# Altium PCB Arduino_DUE_V02b.PcbDoc (part 2 of 3)
Units mm, origin at the board's own origin, x right, y up, seen from the top; angles counter-clockwise.
Board outline 112.18 x 53.64 mm, 4 copper layers (Top Layer, Mid-Layer 1, Mid-Layer 2, Bottom Layer); 129 components, 175 nets, 644 pads, 366 vias.
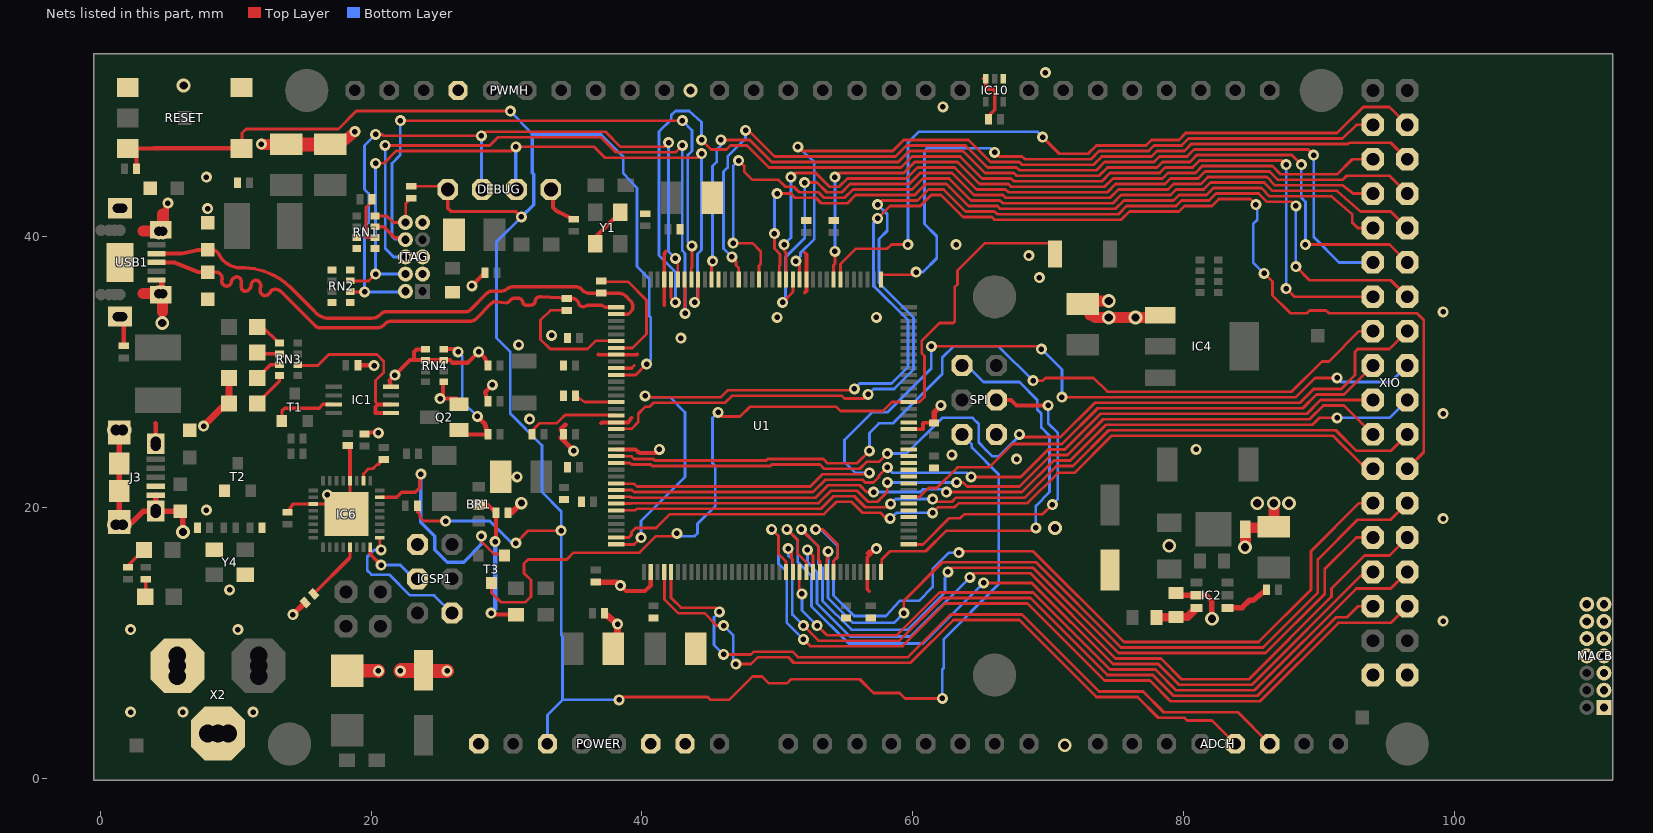
[diagram p4: the nets of this part, all layers, seen from the top]

## Via types
v1: diameter 0.813, hole 0.406, Top Layer to Bottom Layer, 313 vias
v2: diameter 1.016, hole 0.61, Top Layer to Bottom Layer, 52 vias
v3: diameter 0.914, hole 0.508, Top Layer to Bottom Layer, 1 vias

## Nets (pads, with @x,y where several pads share a name; then routed paths per layer and width w, separated by ;. In a path a pad name is that pad's centre, name@x,y a point inside that pad or via, vN(x,y) a via of type N, cw(c..) or ccw(c..) an arc to the next point about the centre after c; other vN are vias at no path point) (continued)
D+: R6.1 U1.37 USB1.3 Z1.1 | length 40.9
  Top Layer w0.254: Z1.1@7.925,37.389 8.525,37.389 cw(c8.5,36.897) 8.991,36.872 ccw(c9.338,36.719) 9.186,36.373 9.195,36.373 ccw(c9.322,36.703) 9.652,36.576 cw(c10.109,36.576) 10.109,37.033 cw(c10.033,36.652) 10.414,36.576 10.414,36.322 ccw(c10.719,36.271) 10.668,35.966 ccw(c10.668,36.424) 11.125,36.424 cw(c11.506,36.398) 11.532,36.779 cw(c11.43,36.373) 11.836,36.271 ccw(c12.243,36.068) 12.04,35.662 ccw(c12.141,36.119) 12.598,36.017 cw(c12.922,35.506) 13.27,36.001 15.816,33.463 ccw(c16.242,33.848) 16.217,33.274 20.463,33.274 ccw(c20.463,33.909) 20.912,33.46 21.023,33.571 cw(c21.472,33.122) 21.472,33.757 27.296,33.757 ccw(c27.296,34.392) 27.745,33.943 28.872,35.069 cw(c29.183,34.779) 29.168,35.204 29.948,35.103 ccw(c29.897,35.53) 30.235,35.264 cw(c30.633,34.967) 30.561,35.458 30.785,35.458 cw(c30.836,35.103) 31.191,35.154 ccw(c31.445,35.204) 31.496,34.95 31.801,34.95 ccw(c31.801,35.255) 32.106,35.255 cw(c32.461,35.204) 32.512,35.56 R6.1@34.635,35.458 ; R6.1@34.392,35.458 34.43,35.458 R6.1@34.442,35.446 R6.1@34.635,35.458 ; 37.287,34.798 37.279,34.807 ; U1.37@38.095,34.785 37.948,34.798 37.299,34.798 ; R6.1@34.635,35.458 34.789,35.458 cw(c34.776,34.854) 35.212,35.272 35.298,35.136 ccw(c35.742,35.228) 35.493,34.849 35.639,34.823 ccw(c35.651,35.218) 35.71,34.828 35.909,34.907 cw(c36.003,34.671) 36.003,34.925 37.033,34.925 37.279,34.807 ; 37.279,34.807 ccw(c37.299,34.827) 37.299,34.798 ; 37.279,34.807 ccw(c37.299,34.827) 37.299,34.798
  Top Layer w0.305: USB1.3@4.369,38.1 USB1.3@4.148,38.1 5.486,38.1 7.214,37.389 7.925,37.389 Z1.1@7.925,37.373
D-: R5.1 U1.38 USB1.2 Z2.1 | length 40.6
  Top Layer w0.254: USB1.2@4.148,38.75 4.445,38.75 ccw(c4.445,38.786) USB1.2@4.47,38.76 ; Z2.1@7.722,39.014 Z2.1@7.925,39.03 ; Z2.1@7.925,39.014 8.395,39.014 cw(c8.127,38.338) 8.797,38.621 8.975,38.333 ccw(c10.4,39.593) 10.302,37.694 cw(c10.484,32.589) 13.965,36.327 ; 13.965,36.327 15.783,34.509 ccw(c16.89,35.393) 16.731,33.985 20.053,33.985 ccw(c20.063,34.85) 20.667,34.231 cw(c21.178,33.807) 21.116,34.468 26.982,34.468 ccw(c27.009,34.936) 27.321,34.586 28.546,35.81 cw(c28.97,35.363) 28.987,35.979 29.603,35.979 ccw(c29.603,36.614) 29.991,36.111 30.093,36.19 cw(c30.443,35.674) 30.481,36.297 35.107,36.297 cw(c35.119,35.699) 35.598,36.057 ccw(c36.098,36.479) 36.149,35.827 R5.1@36.944,35.827 ; U1.38@38.095,34.285 38.883,34.285 ccw(c38.919,34.516) 39.057,34.327 39.277,34.598 ccw(c39.088,34.736) 39.319,34.772 39.319,34.87 ccw(c38.619,34.813) 39.074,35.348 38.835,35.587 ; 38.835,35.587 ccw(c38.268,34.993) 38.249,35.814 36.982,35.814 R5.1@36.982,35.827 ; R5.1@36.944,35.827 36.982,35.763 R5.1@36.982,35.827 ; R5.1@36.944,35.827 R5.1@36.982,35.827
  Top Layer w0.305: USB1.2@4.216,38.76 4.47,38.76 6.045,38.76 7.214,39.014 7.925,39.014 Z2.1@7.925,39.03 Z2.1@7.909,39.014
DAC0(CANRX1): ADCH.5 U1.76 | length 52.9
  Top Layer w0.203: U1.76@41.645,15.235 41.656,15.037 41.656,13.208 42.672,12.192 44.602,12.192 45.517,11.278 v1(46.025,11.278) ; v1(46.939,8.433) 48.057,8.433 48.565,8.941 50.8,8.941 51.206,8.534 59.842,8.534 62.992,11.684 67.869,11.684 73.558,5.994 76.606,5.994 78.13,4.47 80.061,4.47 80.264,4.267 82.093,4.267 ADCH.5@83.82,2.54 ADCH.5@83.718,2.642
  Bottom Layer w0.203: v1(46.025,11.278) 46.736,10.566 46.736,8.636 v1(46.939,8.433)
DAC1: ADCH.6 U1.77 | length 55.4
  Top Layer w0.203: U1.77@42.145,15.235 42.145,13.329 42.875,12.598 45.415,12.598 v1(45.72,12.294) ; v1(46.025,9.144) 48.057,9.144 48.26,9.347 51.105,9.347 51.511,8.941 59.639,8.941 62.789,12.09 68.072,12.09 73.762,6.401 77.013,6.401 78.537,4.877 84.023,4.877 ADCH.6@86.36,2.54
  Bottom Layer w0.203: v1(45.72,12.294) 45.314,11.887 45.314,9.855 v1(46.025,9.144)
EEXTINT: U1.25
EEXTINTA: MACB.8
EMDC: U1.123
EMDCA: MACB.14
EMDIO: U1.127
EMDIOA: MACB.12
EN: IC2.4 R10.2 | length 3.4
  Top Layer w0.406: IC2.4@83.243,12.563 83.278,12.598 84.328,12.598 84.876,13.147 85.141,13.147 R10.2@86.119,13.919
ERASE_CMD: IC6.23 T3.3 | length 17.8
  Top Layer w0.203: v1(28.143,17.882) 28.143,17.475 29.058,16.561 29.743,16.561 T3.3@29.845,16.459
  Top Layer w0.254: IC6.23@20.636,20.757 21.875,20.757 22.25,21.133 23.266,21.133 23.571,21.438 23.571,22.352 v1(23.673,22.454)
  Bottom Layer w0.254: v1(23.673,22.454) 23.673,18.898 24.689,17.882 24.689,16.866 25.603,15.951 26.822,15.951 28.143,17.272 v1(28.143,17.882)
ERASE_S: ERASE.2 T3.1 U1.130 | length 66.3
  Top Layer w0.203: T3.1@28.88,14.427 28.88,13.691 29.566,13.005 31.394,13.005 31.801,13.411 31.801,14.63 31.293,15.138 31.293,15.85 31.598,16.154 34.442,16.154 34.95,16.662 39.827,16.662 41.046,17.882 42.367,17.882 v1(42.57,18.085) ; v1(45.618,27.026) 45.923,26.721 47.244,26.721 47.955,27.432 54.356,27.432 54.661,27.127 57.81,27.127 58.468,27.785 U1.130@59.695,27.785 60.5,27.785 60.858,28.143 60.858,31.191 60.655,31.394 60.655,32.309 61.976,33.63 62.992,33.63 63.094,33.731 63.094,36.271 63.297,36.474 63.297,37.49 65.329,39.522 70.002,39.522 70.51,39.014 ERASE.2@70.51,38.71
  Bottom Layer w0.203: v1(42.57,18.085) 42.672,18.085 42.875,17.882 43.891,17.882 44.094,18.085 44.094,18.796 45.415,20.117 45.415,23.063 45.212,23.266 45.212,26.619 v1(45.618,27.026)
ERX_DV: U1.119
ERX_DVA: MACB.10
ERX_ER: U1.122
ERX_ERA: MACB.13
ERXD0: U1.120
ERXD0A: MACB.9
ERXD1: U1.121
ERXD1A: MACB.11
ETX_CLK: U1.113
ETX_CLKA: MACB.1
ETX_EN: U1.114
ETX_ENA: MACB.3
ETXD0: U1.115
ETXD0A: MACB.5
ETXD1: U1.118
ETXD1A: MACB.7
FB: IC2.3 R11.1 R12.2 | length 3.2
  Top Layer w0.61: R12.2@78.003,11.887 79.426,11.887 R11.1@79.451,11.913 80.293,11.913 IC2.3@80.943,12.563
GATE_CMD: IC1.7 T1.3 | length 4.8
  Top Layer w0.203: IC1.7@17.069,27.61 IC1.7@17.243,27.614
  Top Layer w0.254: T1.3@13.386,26.391 13.411,26.416 13.411,27.127 13.614,27.33 16.154,27.33 16.434,27.61 IC1.7@17.069,27.61
GND: C1.- C2.- C3.- C4.1 C5.1 C6.1 C7.1 C8.1 C9.1 C10.1 C11.- C12.1 C13.1 C14.1 C15.1 C16.1 C17.1 C18.1 C19.1 C21.2 C22.2 C23.2 C24.2 C25.2 C26.2 C27.- C28.2 C29.- C30.1 C31.1 C32.1 C33.- C34.1 C35.- C36.2 C37.2 C38.2 C39.2 C40.2 C41.- D1.A D4.P$2 DEBUG.1 IC1.4 IC2.2 IC4.1 IC6.3 IC6.28 IC6.33 IC10.1 IC10.3 ICSP1.6 J3.P5 J3.P$1 J3.P$2 J3.P$3 J3.P$4 J3.P$5 J3.P$6 J3.P$7 J3.P$8 J3.S1 J3.S2 J3.S3 J3.S4 J3.S5 J3.S6 JTAG.3 JTAG.5 JTAG.9 L.C ON.C PC1.- PC2.- POWER.6 POWER.7 PWMH.7 Q2.2 R2.1 R7.1 R8.1 R11.2 R18.2 RESET.1 RESET.2 RN1.1 RN1.2 RN1.7 RN1.8 RN2.1 RN2.4 RN2.5 RN2.8 RN4.1 RN4.2 RN4.5 RN4.7 SPI.6 T2.3 U1.12 U1.33 U1.44 U1.46 U1.54 U1.58 U1.74 U1.106 U1.126 USB1.5 USB1.P$1 USB1.P$2 USB1.P$3 USB1.P$4 USB1.P$5 USB1.P$6 USB1.P$7 USB1.P$8 USB1.P$9 USB1.P$10 USB1.P$11 USB1.S1 USB1.S2 USB1.S3 USB1.S4 X2.1 X2.3 XIO.35 XIO.36 Y1.2 Y1.4 Y4.2 Y4.4 Z1.2 Z2.2 Z3.1 Z4.1 Z5.1 | length 159
  Top Layer w0.203: RESET.2@10.363,51.613 RESET.2@10.423,51.018 ; R2.1@20.053,42.774 20.053,42.609 19.609,42.164 19.609,39.929 19.615,39.935 RN1.2@20.284,39.935 ; 39.226,30.285 39.421,30.48 ; U1.33@41.645,36.835 U1.33@41.656,36.982 ; 56.896,16.764 57.099,16.967 v1(57.302,16.967) ; U1.126@59.695,25.785 59.737,25.785 U1.126@59.741,25.781
  Top Layer w0.254: USB1.S2@4.448,35.7 4.572,35.776 USB1.P$11@4.572,35.763 ; C36.2@13.818,19.647 14.222,20.257 IC6.3@15.736,20.257 17.538,20.257 17.678,20.117 17.678,20.015 IC6.33@18.186,19.507 ; IC6.33@18.436,19.507 IC6.28@18.436,21.957 ; U1.106@56.645,15.186 56.645,14.583 ; 56.794,13.818 56.645,13.967 56.645,14.583 ; v1(57.302,16.967) 56.642,16.307 56.642,14.58 56.645,14.583 ; IC10.3@65.19,51.65 IC10.3@65.39,51.65 65.39,51.044 65.532,50.902 65.938,50.902 66.04,50.8 66.04,49.378 65.596,48.933 C37.2@65.596,48.666
  Top Layer w0.279: 36.779,31.293 36.787,31.285 U1.44@38.095,31.285 39.616,31.285 39.624,31.293 ; 36.982,26.213 37.055,26.285 U1.54@38.095,26.285 38.985,26.285 39.218,26.619 ; U1.58@38.095,24.285 39.52,24.285 39.726,24.079 ; U1.46@38.095,30.285 39.226,30.285 ; 39.776,24.079 39.827,24.028 v1@41.25,24.028 ; U1.74@40.645,15.133 U1.74@40.645,15.235 ; 41.643,34.95 41.643,38.71 ; U1.33@41.645,36.835 41.645,38.203 41.643,38.71 ; 41.758,38.913 41.643,38.71 ; 52.019,35.865 52.145,35.991 U1.12@52.145,36.835 52.145,38.685 52.019,38.811 ; 56.642,16.612 56.794,16.764 56.896,16.764 ; U1.106@56.645,15.186 U1.106@56.645,15.235 ; U1.126@59.538,25.781 59.741,25.781 60.757,25.781 60.757,26.213 60.795,26.251 C8.1@61.57,26.251
  Top Layer w0.305: C28.2@1.727,31.941 USB1.P$7@1.727,33.771 ; C30.1@18.263,24.575 18.436,24.195 IC6.28@18.436,21.957 ; C31.1@19.012,30.505 20.091,30.505 v1(20.218,30.48) ; C38.2@19.507,25.438 20.462,25.644 v1(20.523,25.502) ; IC1.4@21.468,28.914 21.366,29.393 v1(21.742,29.769) 22.854,30.88 RN4.2@24.014,30.88 ; RN4.1@24.014,31.68 23.349,31.68 23.165,31.496 23.165,30.988 23.266,30.886 24.007,30.886 RN4.2@24.014,30.88 ; RN4.5@25.364,29.28 25.318,29.28 25.298,29.261 25.298,28.245 v1(25.095,28.042) 26.282,28.042 Q2.2@26.5,27.62 ; v1(27.432,36.373) 28.194,37.135 C25.2@28.41,37.338 ; C23.2@28.613,27.838 28.408,28.509 v1(28.956,29.058) ; C24.2@28.613,30.48 28.408,31.028 v1(27.94,31.496) 27.127,30.683 26.01,30.683 25.813,30.88 RN4.7@25.364,30.88 RN4.2@24.014,30.88 ; DEBUG.1@33.274,43.485 33.426,43.637 33.426,42.164 33.691,41.9 C22.2@34.95,41.288 ; Y1.2@36.54,39.49 36.54,39.94 Y1.4@38.39,41.79 ; v1(38.405,14.224) 38.811,13.818 40.234,13.818 40.645,14.229 U1.74@40.645,15.133 ; 39.726,24.079 39.776,24.079
  Top Layer w0.356: 4.064,26.213 4.089,26.187 J3.S3@4.089,24.714 ; 34.341,26.111 33.996,25.766 C15.1@34.201,25.4 33.996,25.136 v1(34.95,24.181)
  Top Layer w0.406: J3.S1@1.397,25.527 J3.S5@1.397,23.241 J3.S6@1.397,21.209 J3.S2@1.397,18.923 2.362,18.923 3.15,19.71 4.064,19.71 J3.S4@4.089,19.736 ; J3.P5@4.089,20.904 J3.S4@4.089,19.736 ; USB1.P$11@4.369,35.865 ccw(c4.356,36.055) 4.547,36.068 USB1.5@4.547,36.779 ; USB1.P$9@4.47,40.945 4.877,40.945 v1@4.877,42.469 ; v2(6.096,18.186) 6.096,19.406 Z4.1@5.893,19.726 5.883,19.736 J3.S4@4.089,19.736 ; v1(14.224,12.09) R18.2@15.129,12.995 ; RN2.5@18.455,35.148 18.491,35.148 RN2.5@18.491,35.154 ; C34.1@30.112,19.609 30.378,19.609 v3(31.09,20.32) ; C10.1@36.576,14.491 38.138,14.491 v1(38.405,14.224) ; C8.1@61.57,26.251 61.57,27.026 v1(62.078,27.534) ; R11.2@79.451,13.691 79.629,13.513 IC2.2@80.943,13.513 81.686,13.513 82.093,13.106 v2(82.093,11.786)
  Top Layer w0.508: v1(7.62,26.01) 8.983,27.373 ON.C@9.491,27.686 L.C@9.491,29.566 ; C18.1@37.224,12.192 v1(38.202,11.379) 38.202,9.879 C1.-@37.873,9.55 ; v1@38.344,14.285 v1(38.405,14.224)
  Top Layer w0.61: USB1.P$9@4.47,40.945 4.47,41.656 4.572,41.656
  Top Layer w0.813: 3.15,40.411 4.572,40.411 4.572,41.656 ; X2.3@4.267,8.331 X2.3@7.214,8.331 ; USB1.P$11@4.369,35.865 cw(c4.28,35.878) 4.267,35.789 3.15,35.789 USB1.P$11@4.572,35.763 ; 4.572,34.442 USB1.P$11@4.572,35.763 ; USB1.P$11@4.572,35.865 USB1.P$11@4.572,35.763 ; X2.1@8.636,1.829 X2.1@8.636,4.775 ; v1(11.887,46.838) 11.911,46.814 C35.-@13.638,46.814 ; C27.-@16.967,46.814 17.678,46.838 v1(18.796,47.752) ; v2(74.473,35.255) 72.949,35.255 72.823,35.333 C29.-@72.542,35.028 73.05,34.747 73.074,34.215 73.277,34.215 73.457,34.036 v2(74.473,34.036) v2(76.454,34.036) 78.232,34.036 78.232,34.138 78.257,34.239 IC4.1@78.283,34.214 ; v2(84.531,17.069) 84.556,16.992 D4.P$2@84.556,18.39 84.681,18.467 C41.-@86.665,18.569 v2(86.665,20.32)
  Top Layer w1.016: USB1.S2@4.448,35.7 ccw(c4.473,35.799) USB1.P$11@4.572,35.773 ; USB1.S1@4.448,40.5 cw(c4.473,40.401) 4.572,40.427 USB1.P$9@4.572,40.411 ; C35.-@13.638,46.814 C35.-@13.716,46.814 C27.-@16.967,46.814 ; D1.A@18.237,7.94 20.508,7.94 v1(20.523,7.925) ; PC1.-@23.851,7.988 22.187,7.988 v1(22.149,7.925) v1(25.603,7.925) ; USB1.P$9@4.572,40.411 ccw(c4.661,40.424) 4.674,40.335 4.572,40.335 USB1.P$9@4.572,40.411
  other v1: 2.235,4.877 6.096,4.877 11.278,4.877 2.235,10.973 10.16,10.973 99.162,11.608 9.55,13.919 99.162,19.177 7.823,19.812 16.764,20.93 30.785,22.25 67.666,23.571 62.89,23.876 41.275,24.282 80.924,24.282 31.699,26.518 99.162,26.924 30.886,32.004 42.875,32.512 33.325,32.715 49.987,34.036 57.302,34.036 99.162,34.442 69.342,36.982 68.58,38.608 63.195,39.421 7.925,42.062 4.978,42.469 7.823,44.399 62.23,49.581 69.799,52.121
  other v2: 71.222,2.438 78.943,17.17 70.51,18.491 85.446,20.32 87.782,20.32 4.572,33.63 43.586,50.8 6.147,51.156
JTAG_RESET: JTAG.10 R1.1 RN1.4 | length 4.5
  Top Layer w0.203: RN1.4@20.284,41.535 21.152,41.535 21.641,41.046 JTAG.10@22.53,41.046 ; R1.1@22.962,42.837 22.555,42.469 JTAG.10@22.555,41.072 ; JTAG.10@22.53,41.046 JTAG.10@22.555,41.072 ; JTAG.10@22.53,41.046 22.555,41.046 JTAG.10@22.555,41.072
JTAG_TCK: DEBUG.2 JTAG.4 RN2.7 U1.28 | length 53.6
  Top Layer w0.203: RN2.7@18.455,36.747 18.593,36.728 19.812,36.728 v1(20.32,37.236) ; v1(20.32,45.415) 20.93,45.415 21.844,46.33 30.378,46.33 v1(30.683,46.634) 36.474,46.634 37.287,45.822 44.094,45.822 v1(44.399,46.126) ; v1(43.891,35.154) 44.145,35.407 U1.28@44.145,36.835
  Bottom Layer w0.203: v1(20.32,45.415) v1(20.32,37.236) JTAG.4@22.53,37.236 ; v1(43.891,35.154) 44.094,35.357 44.094,38.71 44.399,39.014 v1(44.399,46.126)
  Bottom Layer w0.254: v1(30.683,46.634) 30.683,43.84 DEBUG.2@30.734,43.485
JTAG_TDI: JTAG.8 RN1.3 U1.29 | length 45.7
  Top Layer w0.203: v1(22.149,48.565) v1(42.977,48.565) ; U1.29@43.645,36.835 43.637,37.668 43.688,37.719 v1(43.688,39.319)
  Top Layer w0.254: RN1.3@20.284,40.735 20.936,40.735 21.742,39.929 22.377,39.929 JTAG.8@22.53,39.776
  Bottom Layer w0.203: v1(22.149,48.565) 22.149,46.025 21.539,45.415 21.539,40.03 21.742,39.827 22.555,39.827 22.53,39.802 JTAG.8@22.53,39.776 ; v1(42.977,48.565) 43.688,47.854 43.688,46.33 43.383,46.025 43.383,39.624 v1(43.688,39.319)
JTAG_TDO: JTAG.6 U1.30 | length 47.3
  Top Layer w0.203: v1(21.031,46.736) 28.753,46.736 29.362,47.346 36.982,47.346 38.1,46.228 42.469,46.228 v1(42.977,46.736) ; U1.30@43.145,36.835 43.129,36.8 43.129,36.576 43.18,36.576 v1(43.18,34.341)
  Bottom Layer w0.203: v1(21.031,46.736) 21.031,39.141 21.666,38.506 JTAG.6@22.53,38.506 ; v1(42.977,46.736) 42.977,38.964 43.18,38.76 v1(43.18,34.341)
JTAG_TMS: DEBUG.3 JTAG.2 RN2.6 U1.31 | length 53.2
  Top Layer w0.203: RN2.6@18.455,35.947 18.593,35.916 v1(19.507,35.916) ; v1(20.32,47.549) 20.828,47.549 20.93,47.447 v1(28.143,47.447) 28.448,47.752 37.287,47.752 38.405,46.634 41.656,46.634 v1(41.961,46.939) ; v1(42.469,38.405) 42.647,38.227 42.647,37.008 U1.31@42.645,36.835
  Bottom Layer w0.203: v1(20.32,47.549) 19.507,46.736 19.507,43.485 19.812,43.18 19.812,41.046 19.507,40.742 v1(19.507,35.916) 22.504,35.916 JTAG.2@22.53,35.966 ; v1(28.143,47.447) 28.143,43.84 DEBUG.3@28.194,43.485 ; v1(41.961,46.939) 41.961,38.913 v1(42.469,38.405) ; JTAG.2@22.53,35.966 22.555,35.941 22.555,35.966 JTAG.2@22.53,35.966
L13: IC1.1 IC1.2 RN3.6 | length 13.2
  Top Layer w0.203: RN3.6@14.569,30.537 14.789,30.537 14.935,30.48 16.053,30.48 16.866,31.293 20.422,31.293 20.93,30.785 20.93,29.972 20.32,29.362 20.32,27.796 20.502,27.614 ; IC1.1@21.336,26.975 IC1.1@21.468,26.964
  Top Layer w0.305: IC1.1@21.336,26.975 20.32,26.975 20.32,27.432 20.502,27.614 IC1.2@21.468,27.614
MASTER-RESET: C20.1 DEBUG.4 POWER.3 R1.2 R23.2 RESET.3 RESET.4 SPI.5 U1.47 | length 185.5
  Top Layer w0.203: 9.144,46.533 RESET.4@10.423,46.518 10.465,46.56 10.465,47.65 10.77,47.955 17.577,47.955 18.898,49.276 v1(30.277,49.276) ; R1.2@22.962,43.726 DEBUG.4@25.41,43.728 ; R23.2@23.406,20.117 23.406,19.672 23.612,19.467 23.612,19.264 23.876,18.999 v1(25.502,18.999) ; v1(30.683,17.374) 31.598,18.288 v1(34.036,18.288) ; U1.47@38.095,29.785 39.539,29.785 v1(40.335,30.582) ; v1(38.303,5.791) 38.506,5.994 44.856,5.994 45.06,5.791 46.431,5.791 48.158,7.518 48.87,7.518 49.378,7.01 50.698,7.01 51.003,7.315 56.083,7.315 57.099,6.299 59.03,6.299 59.436,5.893 v1(62.179,5.893) ; SPI.5@63.602,25.4 SPI.5@63.627,25.4
  Top Layer w0.254: DEBUG.4@25.41,43.728 DEBUG.4@25.654,43.485 25.654,42.113 25.908,41.859 30.683,41.859 v1(31.09,41.453)
  Top Layer w0.305: RESET.3@2.023,46.518 RESET.3@2.54,46.518 ; C20.1@2.68,45.009 2.68,46.378 RESET.3@2.54,46.518 ; RESET.4@10.423,46.518 10.423,46.634 10.058,46.634 RESET.4@10.058,46.533 ; RESET.4@10.465,46.533 RESET.4@10.058,46.533 ; RESET.3@2.54,46.518 3.962,46.518 3.962,46.533 9.144,46.533 RESET.4@10.058,46.533
  Bottom Layer w0.203: v1(25.502,18.999) 28.753,18.999 30.378,17.374 v1(30.683,17.374) ; v1(30.277,49.276) 31.902,47.549 36.982,47.549 38.608,45.923 38.608,44.704 39.624,43.586 39.624,37.795 40.538,36.881 40.538,34.138 40.64,34.036 40.64,30.886 v1(40.335,30.582) ; v1(31.09,41.453) 29.261,39.624 29.261,32.512 30.277,31.496 30.277,26.924 32.614,24.587 32.614,21.133 34.036,19.71 v1(34.036,18.288) 34.036,10.566 34.138,10.465 34.138,5.791 ; POWER.3@33.02,2.54 33.02,4.674 34.138,5.791 ; v1(38.303,5.791) 34.138,5.791 ; v1(62.179,5.893) 62.179,8.026 62.281,8.128 62.281,10.262 66.345,14.326 66.345,22.454 64.364,24.435 64.364,24.638 63.602,25.4 SPI.5@63.627,25.4
  Bottom Layer w0.254: v1(31.09,41.453) 32.004,42.367 32.004,44.602 31.902,44.704 31.902,47.549
MISO: SPI.1 U1.108 | length 30.2
  Top Layer w0.203: U1.108@57.645,15.235 57.709,16.154 58.318,16.764 60.96,16.764 62.484,18.288 68.885,18.288 v1(69.088,18.491)
  Bottom Layer w0.203: SPI.1@63.602,30.48 SPI.1@63.627,30.48 64.008,30.48 65.227,29.261 67.869,29.261 69.19,27.94 69.19,27.229 69.494,26.924 69.494,25.908 70.104,25.298 70.104,21.133 69.088,20.117 v1(69.088,18.491)
MISO2: IC6.17 ICSP1.1 | length 10.7
  Top Layer w0.203: IC6.17@20.636,17.757 20.636,16.956 v1(20.726,16.866)
  Bottom Layer w0.203: v1(20.726,16.866) 20.218,16.866 19.71,16.358 19.71,15.342 20.015,15.037 21.336,15.037 22.86,13.513 24.638,13.513 ICSP1.1@25.959,12.192
MOSI: SPI.4 U1.109 | length 23.7
  Top Layer w0.203: U1.109@59.695,17.285 59.741,17.272 60.757,17.272 62.687,19.202 63.5,19.202 63.805,19.507 69.596,19.507 v1(70.307,20.218) ; SPI.4@66.142,27.94 66.167,27.965 SPI.4@66.167,27.94 SPI.4@66.142,27.94
  Top Layer w0.305: SPI.4@66.142,27.94 67.259,27.94 67.666,27.534 v1(70.002,27.534)
  Bottom Layer w0.203: v1(70.002,27.534) 70.002,26.213 70.714,25.502 70.714,20.625 v1(70.307,20.218)
MOSI2: IC6.16 ICSP1.4 | length 4.7
  Top Layer w0.254: IC6.16@19.936,17.057 19.936,16.538 v1(20.726,15.748)
  Bottom Layer w0.203: v1(20.726,15.748) 22.098,15.748 22.149,15.748 23.165,14.732 ICSP1.4@23.419,14.732
N$1: IC6.26 R21.1 | length 2.5
  Top Layer w0.203: IC6.26@19.436,21.957 19.436,22.484 19.812,22.86 20.117,22.86 20.422,23.165 20.564,23.165 R21.1@20.93,23.533
NetBR1_2: BR1.2 C34.2 JR1.2 L3.1 | length 11.3
  Top Layer w0.305: JR1.2@27.94,20.053 BR1.2@27.94,20.229 28.603,20.229 C34.2@29.223,19.609 29.223,17.437 v1(29.159,17.475) ; v1(28.854,12.192) 28.956,12.09 L3.1@30.701,12.09
  Bottom Layer w0.305: v1(28.854,12.192) 29.159,12.497 v1(29.159,17.475)
NetIC6_13: IC6.13 R18.1 | length 4.5
  Top Layer w0.254: R18.1@15.757,13.624 18.436,16.303 IC6.13@18.436,17.057
NetJ3_P4: J3.P4
NetL_A: L.A RN3.3 | length 2
  Top Layer w0.254: L.A@11.591,29.566 12.563,30.537 RN3.3@13.219,30.537
NetON_A: ON.A RN3.4 | length 2.7
  Top Layer w0.254: ON.A@11.591,27.686 13.219,29.314 RN3.4@13.219,29.737
NetPOWER_1: POWER.1
NetQ2_1: Q2.1 R3.2 RN4.8 | length 10.6
  Top Layer w0.203: RN4.8@25.364,31.68 RN4.8@25.4,31.699
  Top Layer w0.279: Q2.1@26.5,25.72 26.416,25.804 26.416,25.806 26.822,25.4 Q2.1@27.127,25.4
  Top Layer w0.305: RN4.8@25.4,31.699 26.213,31.699 v1(26.416,31.496) ; Q2.1@27.127,25.4 R3.2@28.613,25.4 R3.2@28.651,25.4
  Top Layer w0.356: v1(27.838,26.721) 28.408,26.152 R3.2@28.613,25.4
  Bottom Layer w0.203: v1(26.416,31.496) 26.721,31.191 26.721,27.838 v1(27.838,26.721)
NetR4_1: R4.1 U1.53 | length 7
  Top Layer w0.203: R4.1@31.864,25.4 31.902,25.4 31.902,25.705 32.41,26.213 33.68,26.213 34.188,26.721 34.214,26.721 34.315,26.822 37.998,26.822 U1.53@38.095,26.785
NetR5_2: R5.2 U1.43 | length 9.7
  Top Layer w0.203: R5.2@36.982,36.716 R5.2@36.741,36.678 ; U1.43@38.095,31.785 39.303,31.785 40.335,32.817 40.335,35.306 38.964,36.678 R5.2@36.741,36.678 ; R5.2@36.728,36.678 R5.2@36.741,36.678 ; R5.2@36.728,36.678 R5.2@36.741,36.678 ; R5.2@36.728,36.678 R5.2@36.741,36.678 ; R5.2@36.728,36.678 R5.2@36.741,36.678 ; R5.2@36.728,36.678 R5.2@36.741,36.678 ; R5.2@36.728,36.678 R5.2@36.741,36.678 ; R5.2@36.728,36.678 R5.2@36.741,36.678 ; R5.2@36.728,36.678 R5.2@36.741,36.678
NetR6_2: R6.2 U1.42 | length 9.8
  Top Layer w0.203: R6.2@34.442,34.557 33.236,34.557 32.512,33.833 32.512,32.41 33.223,31.699 35.966,31.699 36.576,32.309 37.998,32.309 U1.42@38.095,32.285
NetR8_2: R8.2 U1.51 | length 3.1
  Top Layer w0.203: R8.2@35.09,28.245 35.755,27.785 U1.51@38.095,27.785
NetR14_2: R14.2 TX1.A | length 1.3
  Top Layer w0.254: TX1.A@3.319,13.411 3.353,13.445 R14.2@3.353,14.694
NetR15_2: R15.2 RX1.A | length 1.9
  Top Layer w0.254: R15.2@2.032,15.583 2.032,15.68 RX1.A@3.217,16.866 3.251,16.866 RX1.A@3.211,16.906
NetRN3_1: RN3.1 RX.A | length 2.1
  Top Layer w0.254: RX.A@11.591,33.325 11.966,33.356 RN3.1@13.219,32.137
NetRN3_2: RN3.2 TX.A | length 1.7
  Top Layer w0.254: TX.A@11.591,31.445 cw(c11.686,31.242) 11.889,31.337 RN3.2@13.219,31.337
PIN22: U1.1 XIO.3 | length 47.9
  Top Layer w0.203: U1.1@57.645,36.835 57.607,37.186 60.046,37.186 v1(60.249,37.389) ; v1(66.04,46.228) 66.345,45.923 68.072,45.923 68.275,45.72 73.152,45.72 73.762,46.33 77.419,46.33 77.826,46.736 79.858,46.736 80.366,47.244 91.745,47.244 92.761,48.26 XIO.3@93.98,48.26
  Bottom Layer w0.203: v1(60.249,37.389) 60.757,37.389 61.773,38.405 61.773,40.03 60.858,40.945 60.858,46.33 61.062,46.533 65.735,46.533 v1(66.04,46.228)
PIN23: U1.7 XIO.4 | length 54.1
  Top Layer w0.203: U1.7@54.645,36.835 54.661,36.982 54.661,37.973 55.804,39.116 58.115,39.116 58.42,39.421 v1(59.639,39.421) ; v1(69.596,47.346) 70.815,46.126 72.949,46.126 73.558,46.736 77.216,46.736 77.622,47.142 79.654,47.142 80.162,47.65 91.338,47.65 93.269,49.581 95.199,49.581 XIO.4@96.52,48.26
  Bottom Layer w0.203: v1(59.639,39.421) 59.639,46.939 60.452,47.752 69.19,47.752 v1(69.596,47.346)
PIN24: U1.8 XIO.5 | length 49.9
  Top Layer w0.203: U1.8@54.145,36.835 54.145,37.889 54.254,37.998 v1(54.254,38.913) ; v1(54.254,44.399) 54.559,44.704 59.334,44.704 60.147,45.517 63.297,45.517 64.922,43.891 67.056,43.891 67.259,43.688 74.168,43.688 74.778,44.298 78.435,44.298 78.842,44.704 80.874,44.704 81.382,45.212 86.563,45.212 87.173,44.602 91.338,44.602 92.456,45.72 XIO.5@93.98,45.72
  Bottom Layer w0.203: v1(54.254,38.913) v1(54.254,44.399)
PIN25: U1.13 XIO.6 | length 58.4
  Top Layer w0.203: v1(51.359,38.202) 51.638,37.922 51.638,36.957 U1.13@51.645,36.835 ; v1(51.511,46.634) 51.816,46.33 58.522,46.33 59.334,47.142 64.11,47.142 65.735,45.517 67.869,45.517 68.072,45.314 73.355,45.314 73.965,45.923 77.622,45.923 78.029,46.33 80.061,46.33 80.569,46.838 92.151,46.838 92.253,46.939 95.301,46.939 XIO.6@96.52,45.72
  Bottom Layer w0.203: v1(51.359,38.202) 51.714,38.557 51.714,38.811 52.73,39.827 52.73,45.517 v1(51.511,46.634)
PIN26: U1.14 XIO.7 | length 56.2
  Top Layer w0.203: v1(50.394,35.154) 51.145,35.905 U1.14@51.145,36.835 ; v1(52.019,43.993) 52.934,43.993 53.645,43.282 54.762,43.282 55.372,43.891 59.741,43.891 60.554,44.704 62.89,44.704 64.516,43.078 66.65,43.078 66.853,42.875 74.574,42.875 75.184,43.485 78.842,43.485 79.248,43.891 81.28,43.891 81.788,44.399 86.157,44.399 86.766,43.79 91.745,43.79 92.558,43.18 XIO.7@93.98,43.18
  Bottom Layer w0.203: v1(50.394,35.154) 50.597,35.357 50.597,38.481 52.019,39.903 v1(52.019,43.993)
PIN27: U1.15 XIO.8 | length 56.8
  Top Layer w0.203: v1(50.495,39.421) 50.495,38.989 50.645,38.839 U1.15@50.645,36.835 U1.15@50.645,36.827 ; v1(51.003,44.399) 51.308,44.704 52.832,44.704 53.848,43.688 54.559,43.688 55.169,44.298 59.538,44.298 60.35,45.11 63.094,45.11 64.719,43.485 66.853,43.485 67.056,43.282 74.371,43.282 74.981,43.891 78.638,43.891 79.045,44.298 81.077,44.298 81.585,44.806 86.36,44.806 86.97,44.196 91.745,44.196 92.05,44.501 95.199,44.501 XIO.8@96.52,43.18
  Bottom Layer w0.203: v1(50.495,39.421) 51.003,39.929 v1(51.003,44.399)
PIN28: U1.16 XIO.9 | length 54.5
  Top Layer w0.203: v1(49.784,40.234) 49.784,39.116 50.196,38.704 50.19,38.603 50.19,37.897 50.14,37.846 50.14,36.784 U1.16@50.145,36.835 ; v1(49.987,43.18) 51.003,43.18 51.308,42.875 52.832,42.875 53.238,42.469 55.169,42.469 55.778,43.078 60.147,43.078 60.96,43.891 62.484,43.891 64.11,42.266 66.243,42.266 66.446,42.062 74.981,42.062 75.59,42.672 79.248,42.672 79.654,43.078 81.686,43.078 82.194,43.586 85.75,43.586 86.36,42.977 90.932,42.977 92.456,41.656 92.456,41.046 92.862,40.64 XIO.9@93.98,40.64
  Bottom Layer w0.203: v1(49.784,40.234) 49.784,42.977 v1(49.987,43.18)
PIN29: U1.19 XIO.10 | length 64.7
  Top Layer w0.203: v1(46.736,39.522) 48.158,39.522 48.768,38.913 48.768,37.998 48.645,37.875 U1.19@48.645,36.835 ; v1(47.142,45.618) 47.549,45.212 47.549,44.806 48.158,44.196 50.089,44.196 50.597,43.688 51.206,43.688 51.613,43.282 53.035,43.282 53.442,42.875 54.966,42.875 55.575,43.485 59.944,43.485 60.757,44.298 62.687,44.298 64.313,42.672 66.446,42.672 66.65,42.469 74.778,42.469 75.387,43.078 79.045,43.078 79.451,43.485 81.483,43.485 81.991,43.993 85.954,43.993 86.563,43.383 91.338,43.383 93.066,41.859 95.301,41.859 XIO.10@96.52,40.64
  Bottom Layer w0.203: v1(46.736,39.522) 46.736,45.212 v1(47.142,45.618)
PIN30: U1.22 XIO.11 | length 68.2
  Top Layer w0.203: v1(46.634,38.506) 46.939,38.202 46.939,37.897 47.142,37.694 U1.22@47.142,36.779 ; v1(47.65,47.854) 47.854,47.854 49.784,45.923 58.725,45.923 59.538,46.736 63.906,46.736 65.532,45.11 67.666,45.11 67.869,44.907 73.558,44.907 74.168,45.517 77.826,45.517 78.232,45.923 80.264,45.923 80.772,46.431 89.205,46.431 v1(89.611,46.025) ; U1.22@47.142,36.779 47.145,36.782 U1.22@47.145,36.835 U1.22@47.142,36.779
  Bottom Layer w0.203: v1(46.634,38.506) 46.025,39.116 46.025,44.806 46.33,45.11 46.33,45.923 47.65,47.244 v1(47.65,47.854) ; v1(89.611,46.025) 89.611,39.98 91.491,38.1 XIO.11@93.98,38.1
PIN31: U1.26 XIO.12 | length 70.2
  Top Layer w0.203: U1.26@45.145,36.835 45.136,37.109 45.136,38.125 v1(45.212,38.202) ; v1(45.822,47.142) 47.955,47.142 49.581,45.517 58.928,45.517 59.741,46.33 63.703,46.33 65.329,44.704 67.462,44.704 67.666,44.501 73.762,44.501 74.371,45.11 78.029,45.11 78.435,45.517 80.467,45.517 80.975,46.025 87.986,46.025 v1(88.697,45.314) ; v1(89.002,39.421) 95.199,39.421 XIO.12@96.52,38.1
  Bottom Layer w0.203: v1(45.212,38.202) 45.212,45.212 45.517,45.517 45.517,46.431 45.822,46.736 v1(45.822,47.142) ; v1(88.697,45.314) 88.697,42.875 89.002,42.57 v1(89.002,39.421)
PIN32: U1.32 XIO.13 | length 82.5
  Top Layer w0.203: U1.32@42.145,36.835 42.145,35.477 v1(42.469,35.154) ; v1(44.399,47.142) 45.11,46.431 46.228,46.431 46.533,46.736 47.752,46.736 49.378,45.11 59.131,45.11 59.944,45.923 63.5,45.923 65.126,44.298 67.259,44.298 67.462,44.094 73.965,44.094 74.574,44.704 78.232,44.704 78.638,45.11 80.67,45.11 81.178,45.618 87.274,45.618 v1(87.579,45.314) ; v1(87.579,36.17) 88.189,35.56 XIO.13@93.98,35.56 XIO.13@94.082,35.56
  Bottom Layer w0.203: v1(42.469,35.154) 42.469,37.389 41.25,38.608 41.25,47.752 42.164,48.666 42.164,48.971 42.469,49.276 43.485,49.276 44.399,48.463 v1(44.399,47.142) ; v1(87.579,36.17) v1(87.579,45.314)
PIN33: U1.55 XIO.14 | length 84.8
  Top Layer w0.203: U1.55@38.095,25.785 38.202,25.806 39.218,25.806 39.726,26.314 39.726,26.924 40.234,27.432 40.538,27.432 40.843,27.737 46.126,27.737 46.634,28.245 54.762,28.245 54.966,28.042 56.388,28.042 v1(56.693,28.346) ; v1(57.404,42.367) 57.709,42.672 60.35,42.672 61.163,43.485 62.281,43.485 63.906,41.859 66.04,41.859 66.243,41.656 75.184,41.656 75.794,42.266 79.451,42.266 79.858,42.672 81.89,42.672 82.398,43.18 85.547,43.18 86.157,42.57 87.986,42.57 v1(88.29,42.266) ; v1(88.29,37.795) 89.306,36.779 95.301,36.779 XIO.14@96.52,35.56
  Bottom Layer w0.203: v1(56.693,28.346) 57.099,28.753 58.623,28.753 60.046,30.175 60.046,34.036 57.506,36.576 57.506,39.827 58.115,40.437 58.115,41.656 v1(57.404,42.367) ; v1(88.29,37.795) v1(88.29,42.266)
PIN34: U1.59 XIO.15 | length 64.7
  Top Layer w0.203: U1.59@38.095,23.785 38.202,23.774 39.218,23.774 39.421,23.571 40.843,23.571 40.945,23.47 49.174,23.47 49.276,23.571 53.391,23.571 53.696,23.266 55.88,23.266 v1(56.794,24.181) ; v1(68.885,29.362) 69.596,29.362 69.799,29.566 73.355,29.566 74.371,28.55 87.986,28.55 90.221,30.785 90.729,30.785 92.964,33.02 XIO.15@93.98,33.02
  Bottom Layer w0.203: v1(56.794,24.181) 56.794,25.502 57.506,26.213 58.522,26.213 62.179,29.87 62.179,31.09 62.992,31.902 66.345,31.902 v1(68.885,29.362)
PIN35: U1.60 XIO.16 | length 67.3
  Top Layer w0.203: U1.60@38.095,23.285 39.097,23.285 39.218,23.165 40.64,23.165 40.742,23.063 49.479,23.063 49.581,23.165 53.137,23.165 53.442,22.86 56.083,22.86 56.591,23.368 57.506,23.368 v1(58.115,23.978) ; v1(67.869,25.4) 68.072,25.197 70.917,25.197 73.457,27.737 88.595,27.737 89.611,28.753 91.643,28.753 92.659,29.769 92.659,31.496 92.862,31.699 95.199,31.699 XIO.16@96.52,33.02
  Bottom Layer w0.203: v1(58.115,23.978) 59.538,23.978 62.179,26.619 64.414,26.619 64.872,26.162 64.872,24.79 65.397,24.252 65.874,23.774 66.345,23.774 67.869,25.298 v1(67.869,25.4)
PIN36: U1.116 XIO.17 | length 38.3
  Top Layer w0.203: U1.116@59.695,20.785 59.695,20.772 59.792,20.777 60.503,20.777 61.163,21.438 61.773,21.438 63.297,22.962 65.634,22.962 67.361,24.689 71.018,24.689 73.66,27.33 88.798,27.33 89.814,28.346 91.846,28.346 XIO.17@93.98,30.48
PIN37: U1.63 XIO.18 | length 72.3
  Top Layer w0.203: U1.63@38.095,21.785 38.202,21.742 39.421,21.742 39.624,21.539 52.426,21.539 53.34,22.454 56.693,22.454 v1(56.794,22.555) ; v1(61.366,31.902) 69.291,31.902 v1(69.494,31.699) ; v1(71.018,28.143) 88.29,28.143 89.713,29.566 v1(91.338,29.566)
  Bottom Layer w0.203: v1(56.794,22.555) 55.778,22.555 54.966,23.368 54.966,24.994 56.998,27.026 58.115,27.026 61.366,30.277 v1(61.366,31.902) ; v1(69.494,31.699) 71.018,30.175 v1(71.018,28.143) ; v1(91.338,29.566) 91.643,29.261 95.301,29.261 XIO.18@96.52,30.48
PIN38: U1.64 XIO.19 | length 59.6
  Top Layer w0.203: U1.64@38.095,21.285 39.269,21.285 39.421,21.133 52.629,21.133 53.543,22.047 56.286,22.047 56.49,21.844 57.099,21.844 57.506,22.25 57.506,22.352 v1(58.115,22.962) ; v1(64.313,22.25) 67.97,22.25 70.002,24.282 71.222,24.282 73.863,26.924 89.103,26.924 90.119,27.94 XIO.19@93.98,27.94
  Bottom Layer w0.203: v1(58.115,22.962) 58.522,22.555 64.008,22.555 v1(64.313,22.25)
PIN39: U1.65 XIO.20 | length 62
  Top Layer w0.203: U1.65@38.095,20.785 39.159,20.785 39.218,20.726 52.832,20.726 53.746,21.641 56.083,21.641 56.591,21.133 v1(57.099,21.133) ; v1(62.484,21.133) 68.072,21.133 70.409,23.47 71.628,23.47 74.27,26.111 89.51,26.111 90.018,26.619 v1(91.338,26.619)
  Bottom Layer w0.203: v1(57.099,21.133) 60.554,21.133 60.757,21.336 62.281,21.336 v1(62.484,21.133) ; v1(91.338,26.619) 95.199,26.619 XIO.20@96.52,27.94
PIN40: U1.66 XIO.21 | length 61.1
  Top Layer w0.203: U1.66@38.095,20.285 39.183,20.285 39.218,20.32 53.035,20.32 53.95,21.234 55.88,21.234 56.693,20.422 57.404,20.422 58.115,21.133 v1(58.115,21.844) ; v1(63.246,21.844) 63.703,21.844 64.008,21.539 67.869,21.539 70.206,23.876 71.425,23.876 74.066,26.518 89.306,26.518 90.322,27.534 91.846,27.534 XIO.21@93.98,25.4
  Bottom Layer w0.203: v1(58.115,21.844) v1(63.246,21.844)
PIN41: U1.67 XIO.22 | length 62.9
  Top Layer w0.203: U1.67@38.095,19.785 39.495,19.785 39.624,19.914 53.238,19.914 54.153,20.828 55.677,20.828 56.49,20.015 58.115,20.015 v1(58.369,20.269) ; v1(61.468,20.625) 61.671,20.422 62.89,20.422 63.195,20.726 68.275,20.726 70.612,23.063 71.831,23.063 74.473,25.705 91.237,25.705 92.761,24.181 95.301,24.181 XIO.22@96.52,25.4
  Bottom Layer w0.203: v1(58.369,20.269) 58.725,20.625 v1(61.468,20.625)
PIN42: U1.71 XIO.23 | length 61.1
  Top Layer w0.203: U1.71@38.095,17.785 39.019,17.785 39.218,17.983 39.218,18.186 39.522,18.491 41.046,18.491 42.062,19.507 53.442,19.507 54.356,20.422 55.474,20.422 56.286,19.609 57.607,19.609 58.014,19.202 v1(58.318,19.202) ; v1(61.468,19.609) 61.874,20.015 63.094,20.015 63.398,20.32 68.478,20.32 70.714,22.555 71.933,22.555 74.676,25.298 91.034,25.298 93.167,23.165 93.675,23.165 XIO.23@93.98,22.86
  Bottom Layer w0.203: v1(58.318,19.202) 58.826,19.609 v1(61.468,19.609)
PIN43: U1.72 XIO.24 | length 110
  Top Layer w0.203: U1.72@38.095,17.285 37.998,17.272 39.421,17.272 v1(39.929,17.78) ; v1(40.234,28.245) 40.437,28.143 45.822,28.143 46.33,28.651 55.575,28.651 v1(55.677,28.753) ; v1(57.404,41.351) 58.318,42.266 60.554,42.266 61.366,43.078 62.078,43.078 63.703,41.453 65.837,41.453 66.04,41.25 75.387,41.25 75.997,41.859 79.654,41.859 80.061,42.266 82.093,42.266 82.601,42.774 84.938,42.774 v1(85.344,42.367) ; v1(85.954,37.287) 86.563,36.678 86.563,35.662 87.884,34.341 89.103,34.341 89.306,34.544 90.526,34.544 90.729,34.341 97.231,34.341 97.739,33.833 97.739,24.079 XIO.24@96.52,22.86
  Bottom Layer w0.203: v1(39.929,17.78) 39.929,18.999 43.18,22.25 43.18,27.026 42.062,28.143 40.437,28.143 v1(40.234,28.245) ; v1(55.677,28.753) 56.083,29.159 58.42,29.159 59.639,30.378 59.639,33.833 57.099,36.373 57.099,41.046 v1(57.404,41.351) ; v1(85.344,42.367) 85.446,42.266 85.446,41.25 85.141,40.945 85.141,38.1 v1(85.954,37.287)
PIN44: U1.101 XIO.25 | length 62.1
  Top Layer w0.203: v1(52.832,18.39) 53.34,18.39 54.458,17.272 54.458,16.358 54.145,16.045 U1.101@54.145,15.235 ; v1(63.398,16.662) 63.5,16.764 68.885,16.764 75.59,10.058 85.547,10.058 89.408,13.919 89.408,16.764 92.964,20.32 XIO.25@93.98,20.32
  Bottom Layer w0.203: v1(52.832,18.39) 53.238,18.39 54.458,17.17 54.458,16.358 54.153,16.053 54.153,13.513 55.677,11.989 58.014,11.989 59.03,13.106 60.452,13.106 61.468,14.122 61.468,15.443 62.687,16.662 v1(63.398,16.662)
PIN45: U1.100 XIO.26 | length 59.4
  Top Layer w0.203: U1.100@53.645,15.235 53.645,15.24 53.645,16.154 53.746,16.256 v1(53.746,16.764) ; v1(59.334,12.192) 59.334,13.106 62.179,15.951 69.088,15.951 75.387,9.652 85.852,9.652 89.916,13.716 89.916,16.154 92.862,19.101 95.301,19.101 XIO.26@96.52,20.32
  Bottom Layer w0.203: v1(53.746,16.764) 53.746,13.31 55.575,11.481 58.623,11.481 v1(59.334,12.192)
PIN46: U1.99 XIO.27 | length 61.1
  Top Layer w0.203: v1(51.765,18.39) 53.035,17.12 53.035,16.154 53.145,16.045 U1.99@53.145,15.235 ; v1(62.586,15.24) 62.89,15.545 68.885,15.545 75.184,9.246 86.055,9.246 90.424,13.614 90.424,15.443 92.761,17.78 XIO.27@93.98,17.78
  Bottom Layer w0.203: v1(51.765,18.39) 53.035,17.12 53.035,15.85 53.34,15.545 53.34,13.106 55.474,10.973 59.639,10.973 62.382,13.716 62.382,14.834 62.586,15.037 v1(62.586,15.24)
PIN47: U1.98 XIO.28 | length 60.5
  Top Layer w0.203: v1(52.222,16.866) 52.629,16.459 52.629,15.24 U1.98@52.645,15.235 ; v1(64.211,14.834) 64.516,15.138 68.682,15.138 74.981,8.839 78.334,8.839 79.858,7.315 84.836,7.315 90.932,13.411 90.932,14.021 93.37,16.459 95.199,16.459 XIO.28@96.52,17.78
  Bottom Layer w0.203: v1(52.222,16.866) 52.222,15.951 52.934,15.24 52.934,12.903 55.372,10.465 59.842,10.465 v1(64.211,14.834)
PIN48: U1.97 XIO.29 | length 61.2
  Top Layer w0.203: v1(50.698,18.39) 51.511,17.577 51.511,16.561 52.145,15.927 U1.97@52.145,15.235 ; v1(65.227,14.427) 68.783,14.427 74.778,8.433 78.13,8.433 79.654,6.909 85.039,6.909 93.37,15.24 XIO.29@93.98,15.24
  Bottom Layer w0.203: v1(50.698,18.39) 51.511,17.577 51.511,15.951 52.527,14.935 52.527,12.7 55.27,9.957 60.757,9.957 v1(65.227,14.427)
PIN49: U1.96 XIO.30 | length 56.3
  Top Layer w0.203: U1.96@51.645,15.235 51.613,15.037 51.613,13.818 v1(51.816,13.614) ; v1(52.934,11.278) 53.645,10.566 58.826,10.566 61.976,13.716 68.885,13.716 74.574,8.026 77.927,8.026 79.451,6.502 85.242,6.502 92.761,14.021 95.301,14.021 XIO.30@96.52,15.24
  Bottom Layer w0.203: v1(51.816,13.614) 51.816,12.395 v1(52.934,11.278)
PIN50: U1.95 XIO.31 | length 57.6
  Top Layer w0.203: v1(50.8,16.967) 51.043,16.728 51.043,16.216 51.13,16.129 U1.95@51.145,15.235 ; v1(51.918,11.278) 53.035,10.16 59.03,10.16 62.179,13.31 68.682,13.31 74.371,7.62 77.724,7.62 79.248,6.096 85.446,6.096 91.237,11.887 92.05,11.887 92.862,12.7 XIO.31@93.98,12.7
  Bottom Layer w0.203: v1(50.8,16.967) 50.8,16.459 51.105,16.154 51.105,12.09 v1(51.918,11.278)
PIN51: U1.94 XIO.32 | length 64.7
  Top Layer w0.203: v1(49.581,18.39) 50.089,17.882 50.089,16.561 50.645,16.005 U1.94@50.645,15.235 U1.94@50.602,15.235 ; v1(51.918,10.262) 52.426,9.754 59.233,9.754 62.382,12.903 68.478,12.903 74.168,7.214 77.521,7.214 79.045,5.69 85.649,5.69 91.44,11.481 95.301,11.481 XIO.32@96.52,12.7
  Bottom Layer w0.203: v1(49.581,18.39) 50.089,17.882 50.089,15.85 50.698,15.24 50.698,11.481 v1(51.918,10.262)